# Altium PCB EB2019-LW27U19-P-MB03B(KL18).PcbDoc
Units mm, origin at the board's own origin, x right, y up, seen from the top; angles counter-clockwise.
Board outline 187.83 x 97.54 mm, 2 copper layers (Top Layer, Bottom Layer); 78 components, 53 nets, 221 pads, 28 vias.
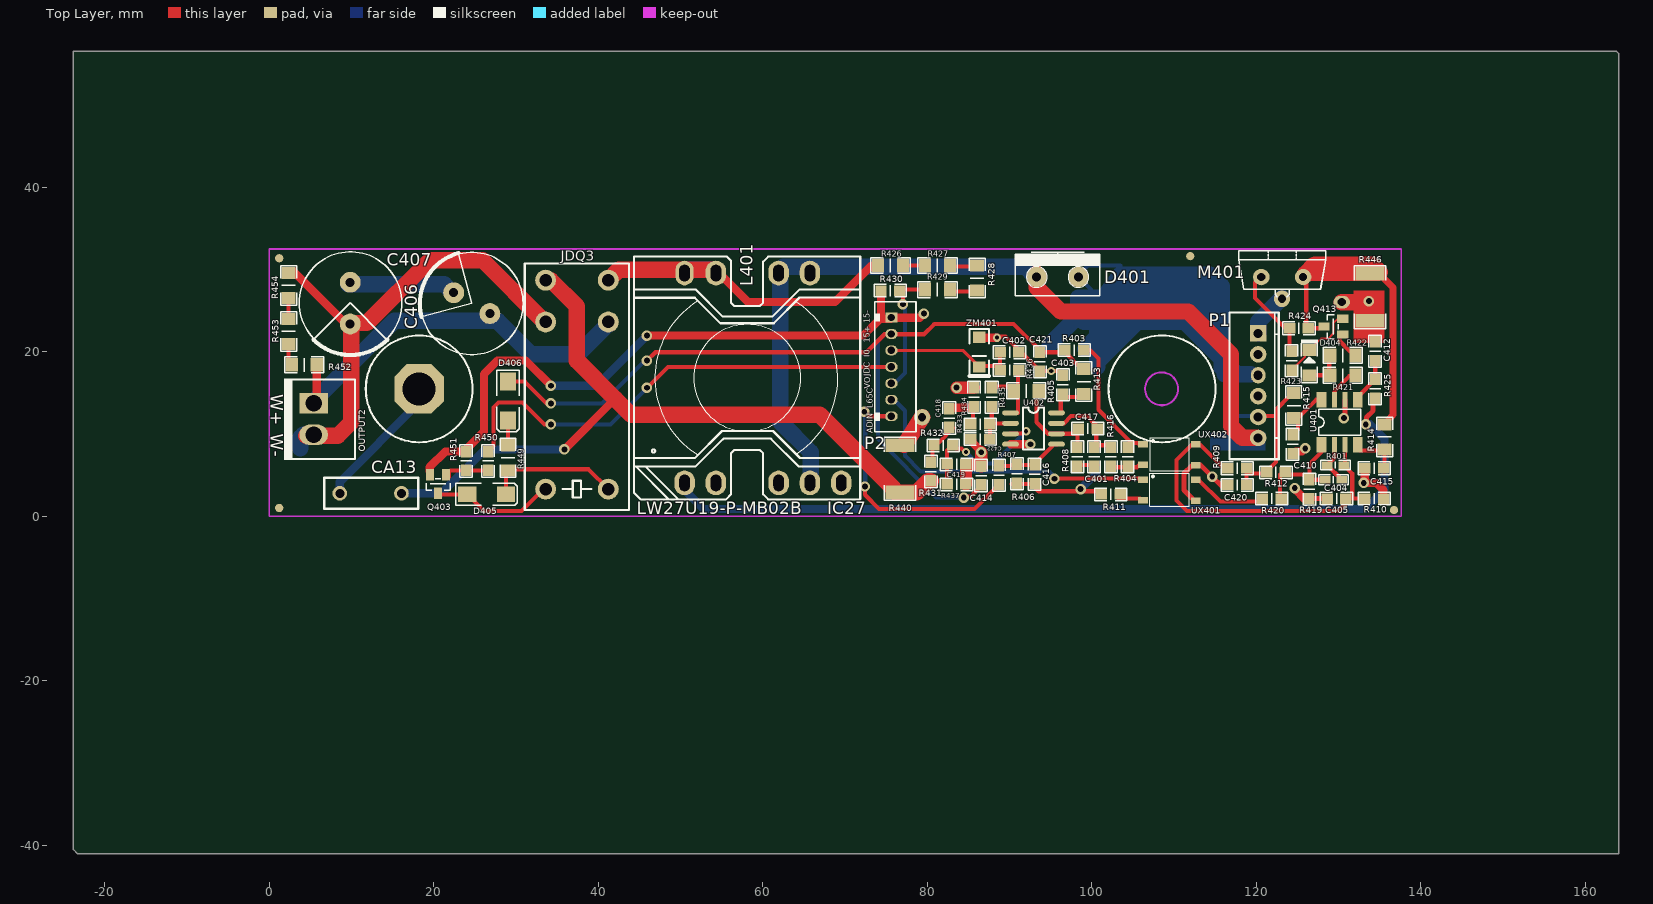
[diagram p0: Top Layer view]
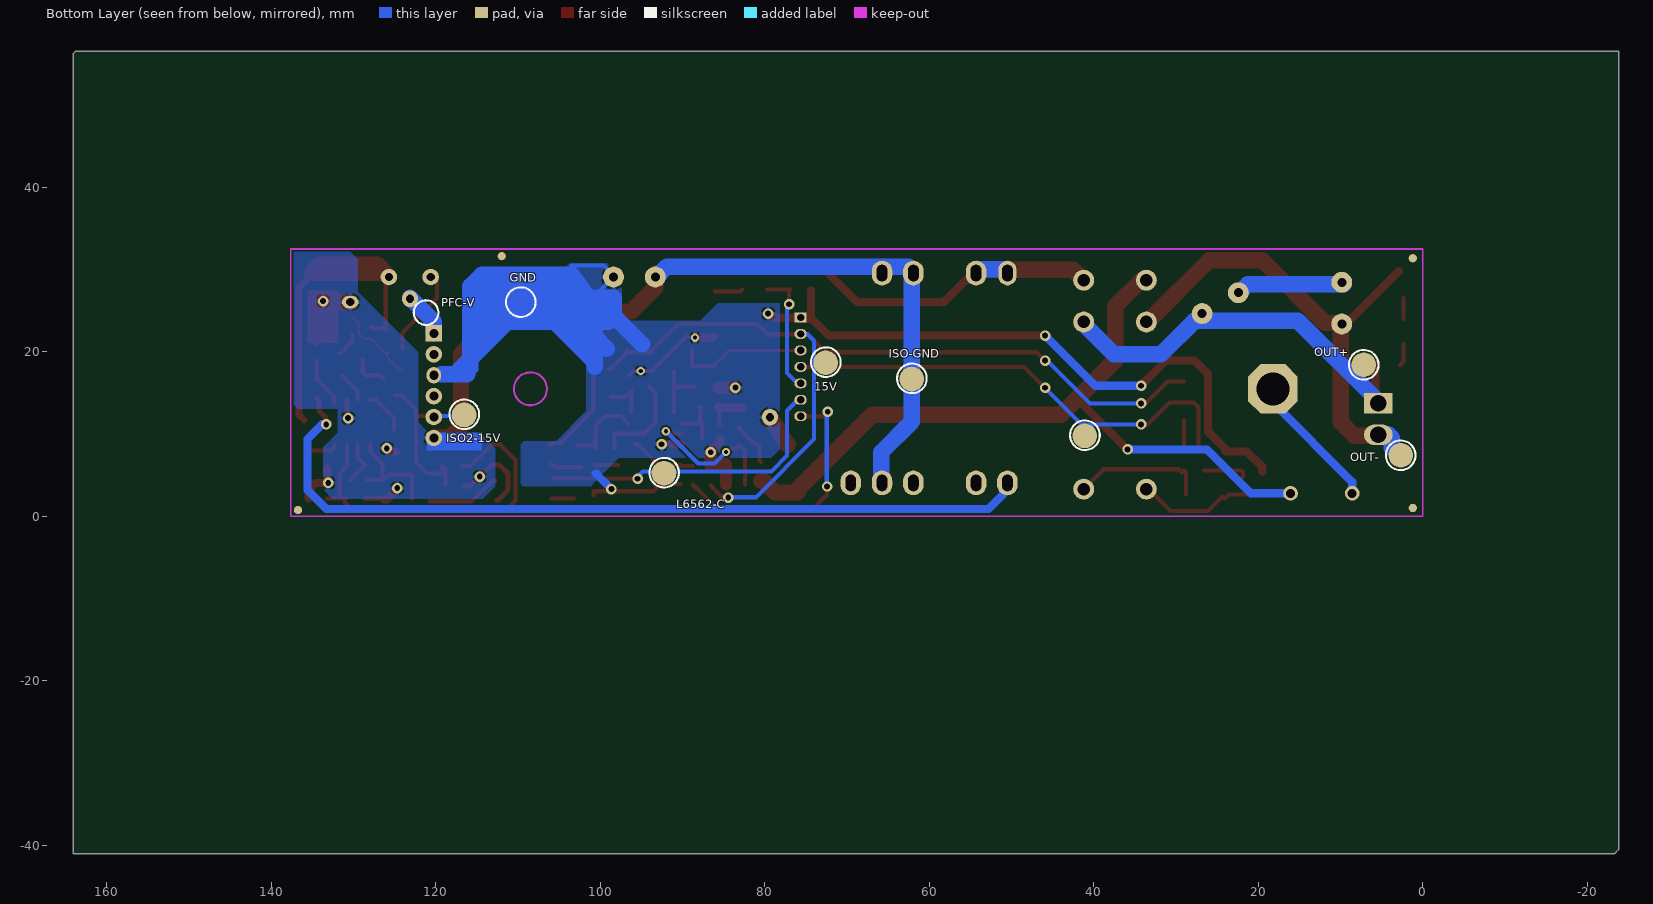
[diagram p1: Bottom Layer view, seen from below]

## Layer stack, top to bottom
Top Solder: solder mask 0.0102, Solder Resist, Dk 3.5
Top Layer: signal copper 0.0356
Dielectric1: dielectric 0.32, FR-4, Dk 4.8
Bottom Layer: signal copper 0.0356
Bottom Solder: solder mask 0.0102, Solder Resist, Dk 3.5

## Board outline
-23.79,56.515 163.789,56.515 164.043,56.261 164.043,-41.021 -23.282,-41.021 -23.79,-40.513 -23.79,56.007

## Design rules (kind name [scope] priority, off if disabled: settings)
Clearance [All] p1: gap=0.254 ignorepadtopadclearanceinfootprint=FALSE
ComponentClearance [All] p1: gap=0 collisioncheckmode=3 verticalgap=0 showdistances=FALSE
HoleToHoleClearance [All] p1: gap=0 allowstackedmicrovias=TRUE
MinimumSolderMaskSliver [All] p1: minsoldermaskwidth=0
PolygonConnect [All] p1: connectstyle=Relief reliefconductorwidth=0.5 reliefentries=4 polygonreliefangle="90 Angle" airgapwidth=0.254
RoutingVias [All] p1: holewidth=0.711 width=1.27 viastyle="Through Hole" minholewidth=0.711 minwidth=1.27 maxholewidth=0.711 maxwidth=1.27
SilkToSilkClearance [All] p1: silktosilkclearance=0
SilkToSolderMaskClearance SilkscreenOverComponentPads [IsPad] p1: minsilkscreentomaskgap=0 clearancetoexposedcopper=TRUE
SolderMaskExpansion [All] p1: expansion=0.102 istentingtop=FALSE
Width [All] p1: maxlimit=5 minlimit=0.254 preferedwidth=0.254 minimp=50.000000 maximp=50.000000 favimp=50.000000
25 further rules are at their usual default settings.

## Components (designator, comment, footprint, x,y, rotation, side; value= is the part's Value field where it differs from the comment)
C401 "" RW0805 100.289,7.239 r0 top
C402 "0805" RW0805 90.002,19.939 r270 top
C403 "301008" RW0805 96.479,16.002 r0 top
C404 "" RW0603 130.388,4.445 r90 top
C405 "301008" RW0805 129.753,2.159 r270 top
C406 "450V47uF" CE12.5 22.438,27.178 r330 top
C407 "450V47uF" CE12.5 9.865,23.368 r90 top
C410 "301009" RW0805 124.419,8.763 r180 top
C412 "301001" RW0805 134.452,20.066 r0 top
C414 "301008" RW0805 86.563,4.953 r0 top
C415 "" RW0805 134.325,5.842 r90 top
C416 "301008" RW0805 93.066,5.105 r180 top
C417 "301008" RW0805 99.527,10.668 r270 top
C418 "0805" RW0805 82.677,11.938 r0 top
C419 "301008" RW0805 83.566,6.325 r270 top (schematic designator C414)
C420 "301013" RW0805 117.688,3.81 r90 top
C421 "301013" RW0805 93.685,18.796 r180 top
C422 "301008" RW0805 86.462,9.373 r270 top (schematic designator C414)
CA13 "102" Y2C 16.225,2.822 r270 top
D401 "308006" TO-220-KA 95.844,29.083 r0 top
D404 "307004" SOD-123 126.451,18.669 r0 top
D405 "M7" SMA 28.661,2.667 r180 top
D406 "M7" SMA 29.042,11.811 r90 top
JDQ3 "HF115F" RELAY-HF115F 41.234,3.302 r90 top locked
L401 "PQ26/25" T-PQ2625 55.368,15.538 r180 top
M401 "314012" TO220VS 120.609,29.083 r0 top
OUTPUT2 "322055" JST-3.96-2P 5.42,13.716 r270 top
P1 "Header 6" 6P插座 120.228,22.225 r270 top
P2 "Header 7" 2.0*7 75.651,24.161 r270 top
Q403 "2N3904" SOT-23-BEC 20.533,3.937 r180 top
Q413 "309005" SOT-23-BEC 129.372,23.063 r90 top
R401 "" RW0603 128.61,6.223 r270 top
R403 "" RW0805 97.876,20.193 r270 top
R404 "" RW0805 104.353,7.239 r180 top
R405 "" RW1206 93.558,15.24 r90 top
R406 "" RW0805 90.907,5.156 r0 top
R407 "303020" RW0805 88.722,5.004 r180 top
R408 "303046" RW0805 98.257,7.239 r0 top
R409 "" RW0805 117.688,5.842 r270 top
R410 "" RW0805 134.325,2.159 r90 top
R411 "" RW0805 102.321,2.667 r270 top
R412 "303053" RW0805 122.387,5.334 r270 top
R413 "303074" RW1206 99.019,14.859 r0 top
R414 "" RW1206 135.595,8.128 r0 top
R415 "303074" RW1206 124.546,11.938 r0 top
R416 "0805" RW0805 102.321,7.239 r0 top
R419 "" RW0805 126.451,3.302 r0 top
R420 "" RW0805 121.879,2.159 r270 top
R421 "303075" RW1206 128.991,17.145 r270 top
R422 "" RW1206 128.991,19.558 r270 top
R423 "303073" RW0805 124.292,18.923 r0 top
R424 "303043" RW0805 125.181,22.86 r90 top
R425 "303055" RW0805 134.452,15.494 r180 top
R426 "303094" RW1206 74,30.48 r270 top
R427 "303094" RW1206 79.715,30.48 r270 top
R428 "303094" RW1206 86.065,30.48 r180 top
R429 "303094" RW1206 82.763,27.559 r90 top
R430 "303033" RW0805 75.524,27.432 r270 top
R431 "0805" RW0805 80.442,5.436 r0 top
R432 "0805" RW0805 81.966,8.611 r270 top
R433 "0805" RW0805 86.446,11.176 r90 top
R434 "0805" RW0805 85.684,14.478 r0 top
R435 "0805" RW0805 87.843,14.478 r0 top
R436 "0805" RW0805 90.002,17.78 r90 top
R437 "0805" RW0805 83.566,3.886 r90 top (schematic designator R433)
R440 "" RW2512 76.683,8.661 r180 top
R446 "" RW2512 133.817,29.515 r180 top
R449 "1206" RW1206 29.042,8.636 r180 top
R450 "0805" RW0805 26.629,6.731 r180 top
R451 "0805" RW0805 23.962,6.731 r180 top
R452 "303094" RW1206 2.753,18.415 r270 top
R453 "303094" RW1206 2.372,24.003 r180 top
R454 "303094" RW1206 2.372,29.591 r180 top
U401 "311046" SO-8 130.134,11.43 r0 top
U402 "311026" SOP-8 90.129,12.573 r270 top
UX401 "317001" LTV 109.433,3.175 r270 top
UX402 "317001" LTV 109.433,7.493 r270 top
ZM401 "5.1V" 二极管 86.319,21.761 r270 top

## Footprints (in the part's own frame and the unit in brackets; to place one, negate y for a bottom-side part, rotate by r counter-clockwise, add the part's x,y. Pads: shape width x height; smd on the part's side, far side on the other; paste and mask are expansions set on the pad)
2.0*7 [mm]
  rect 1.2x1.5 hole 0.9: 1(0,0)
  oval 1.2x1.5 hole 0.9: 2(2,0) 3(4,0) 4(6,0) 5(8,0) 6(10,0) 7(12,0)
  silkscreen extent -1.9,-2.01 13.89,2.99
6P插座 [mm]
  rect 2x2 hole 1.1: 1(0,0)
  round 2 hole 1.1: 2(2.54,0) 4(7.62,0) 5(10.16,0) 6(12.7,0)
  oval 2x1.8 hole 1.1: 3(5.08,0)
  silkscreen extent -2.54,-3.5 15.29,2.5
CE12.5 [mil]
  round 100 hole 43: +(200,0) -(0,0)
  silkscreen extent -148,-246 346,244
JST-3.96-2P [mm]
  rect 2.5x3.5 hole 2: 1(0,0)
  oval 2.5x3.5 hole 2: 2(3.81,0)
  silkscreen extent -3.05,-3.59 6.86,5.02
LTV [mm]
  rect 0.8x1.2 smd: 1(-1.27,-3.2) 2(1.23,-3.2) 3(1.27,3.2) 4(-1.27,3.2)
  silkscreen extent -2.04,-2.4 1.96,2.4
RELAY-HF115F [mil]
  round 100 hole 60: 1(0,300) 2(0,0) 3(800,300) 4(800,0) 5(1000,300) 6(1000,0)
  silkscreen extent -100,-100 1080,400
RW0603 [mil]
  rect 35x50 smd: 1(0,0) 2(0,80)
  silkscreen extent -23,-30 23,110
RW0805 [mil]
  rect 50x55 smd: 1(0,-45) 2(0,45)
  silkscreen extent -30,-77 30,77
RW1206 [mil]
  rect 66x58 smd: 1(0,0) 2(0,120)
  silkscreen extent -38,-34 38,154
RW2512 [mil]
  rect 140x65 smd: 1(0,0) 2(0,227)
  silkscreen extent -76,-38 76,265
SMA [mil]
  rect 87x75 smd: A(180,0) K(-6,0)
  silkscreen extent -60,-53 234,53
SO-8 [mm]
  rect 1.2x1.905 smd: 1(-2.2,-2.731) 4(2.2,-2.731) 5(2.2,2.73) 8(-2.2,2.73)
  rect 0.61x1.905 smd: 2(-0.63,-2.73) 3(0.64,-2.731) 6(0.64,2.73) 7(-0.63,2.73)
  silkscreen extent -2.53,-1.56 2.55,1.59
SOD-123 [mil]
  rect 66x58 smd: A(0,-61) K(0,61)
  silkscreen extent -41,-95 41,110
SOP-8 [mil]
  oval 24x80 smd: 1(0,0) 2(50,0) 3(100,0) 4(150,0) 5(150,220) 6(100,220) 7(50,220) 8(0,220)
  silkscreen extent -25,60 175,160
SOT-23-BEC [mil]
  rect 40x55 smd: B(-38,-45) C(0,45) E(38,-45)
  silkscreen extent -58,-24 57,30
T-PQ2625 [mm]
  rect 0x0 all layers, no hole: 1(8.673,11.474)
  oval 2.5x3 hole 1.25 slot 2 at 90 deg: 2(4.863,11.474) 3(1.053,11.474) 4(-6.567,11.474) 5(-10.377,11.474) 6(-14.187,11.474)
  round 0 all layers, no hole: 7(-14.187,-14.027) 12(8.673,-14.026)
  oval 2.5x3 hole 1.3 slot 2 at 90 deg: 8(-10.377,-14.027) 9(-6.567,-14.027) 10(1.053,-14.027)
  oval 2.2x3 hole 1.3 slot 2 at 90 deg: 11(4.863,-14.027)
  silkscreen extent -16.49,-16.03 11.01,13.47
TO220VS [mm]
  round 2 hole 1: 1(0,0) 2(2.517,-2.646) 3(5.08,0)
  silkscreen extent -2.75,-2.42 7.83,3.17
TO-220-KA [mil]
  round 100 hole 43: A(100,0) K(-100,0)
  silkscreen extent -202,-90 202,118
Y2C [mil]
  round 70 hole 43.31: 1(1.09,-5.11) 2(1.09,-300.38)
  silkscreen extent -74,-375 76,75
二极管 [mm]
  rect 1.35x1.5 smd: 1(0,0) 2(3.6,0)
  silkscreen extent -1.02,-1.2 4.7,1.2

## Part data
C401 C403 C404 C405 C414 C416 C417 C419 C422: library part CAP, "贴片?"
C402 C418: library part C
C406 C407: library part "Cap Pol2", "Polarized Capacitor"
C410 C412 C415 C420 C421: library part C, "贴片?"
CA13: library part CAP, "Cap"
D401: library part "Diode 1N914", "直插二"
D404: library part DIO
JDQ3: library part "Relay - 两组常开", "Dual-Pole Single-"
L401: library part indu
M401: library part MOSFET-N, "TO2"
OUTPUT2: library part "Header 2", "接线?"
P1: "Header, 6-Pi"
P2: "Header,"
Q403: library part NPN, "NPN Bipolar Tra"
Q413: library part PNP
R401 R403 R404 R405 R406 R407 R408 R409 R410 R411 R412 R413 R414 R415 R419 R420 R421 R422 R423 R424 R425 R426 R427 R428 R429 R430 R440 R446 R452 R453 R454: library part Res2, "贴片?"
R416 R431 R432 R433 R434 R435 R436 R437 R449 R450 R451: library part Res2, "Resistor"
U401: library part L6562, "贴片"
U402: library part LM393
UX401 UX402: library part Optoisolator1

## Free pads (board coordinates)
  round 1 all layers, no hole: 0(1.229,1.016) 0(1.229,31.369) 0(111.973,31.623) 0(136.738,0.762)
  round 3 on Bottom Solder: 0(2.703,7.416) 0(7.198,18.415) 0(41.107,9.779) 0(62.139,16.687) 0(72.603,18.669) 0(92.253,5.232) 0(109.737,26.062) 0(116.545,12.319) 0(121.194,24.688)
  round 3 smd far side: 0(2.703,7.416) 0(7.198,18.415) 0(41.107,9.779) 0(62.139,16.687) 0(72.603,18.669) 0(92.253,5.232) 0(116.545,12.319)
  oct 6x6 hole 4: 0(18.247,15.494)
  round 2 hole 1: 2(79.375,12.04)
  oval 2x1.524 hole 1: 3(130.388,26.035)

## Via types
v1: diameter 1.27, hole 0.711, Top Layer to Bottom Layer, 24 vias
v2: diameter 1, hole 0.5, Top Layer to Bottom Layer, 4 vias

## Nets (pads, with @x,y where several pads share a name; then routed paths per layer and width w, separated by ;. In a path a pad name is that pad's centre, name@x,y a point inside that pad or via, vN(x,y) a via of type N, cw(c..) or ccw(c..) an arc to the next point about the centre after c; other vN are vias at no path point)
15V: C414.1 C421.1 D406.A P2.2 pad.0@72.603,18.669 R403.1 R413.2 | length 107.5
  Top Layer w0.5: D406.A 31.074,16.383 33.741,13.716 v1(34.249,13.716) ; v1(45.933,18.923) 46.949,19.939 72.603,19.939 74.793,22.129 79.619,22.129 80.858,23.368 90.51,23.368 93.685,20.193 C421.1 ; v1(84.448,2.268) 84.595,2.415 85.285,2.415 85.911,3.042 85.911,3.095 86.563,3.746 C414.1 ; C421.1@94.066,19.939 R403.1@96.733,19.939 ; R403.1 R403.1@96.733,19.939 ; R413.2 98.765,17.907 R403.1@96.733,19.939
  Bottom Layer w0.5: v1(34.249,13.716) 40.472,13.716 45.679,18.923 v1(45.933,18.923) ; P2.2@75.651,22.129 74.793,22.129 74,21.336 74,9.398 81.087,2.311 84.405,2.311 v1(84.448,2.268)
ADIN2: P2.7 R407.2 | length 32
  Top Layer w0.508: v1(72.349,12.7) 72.888,12.161 P2.7 ; v1(72.418,3.625) 72.418,2.618 74.147,0.889 85.75,0.889 88.278,3.416 88.341,3.416 88.722,3.797 R407.2
  Bottom Layer w0.508: v1(72.349,12.7) 72.476,12.573 72.476,3.683 v1(72.418,3.625)
EARTH: CA13.2 pad.0@18.247,15.494 | length 15.6
  Bottom Layer w1: CA13.2 8.595,4.191 pad.0@18.12,13.716
  Bottom Layer w2: pad.0@17.358,13.716 pad.0@18.12,13.716
GND: C402.2 C403.2 C414.2 C416.2 C419.2 C421.2 C422.1 D401.A P1.3 P2.1 pad.2 Q403.E R406.1 R411.1 R430.1 R434.2 R437.1 R440.1 R451.1 U402.4 ZM401.1 | length 257.8
  Top Layer w0.5: ZM401.1@86.192,21.844 89.494,21.844 C421.2 v2(95.082,17.653) 95.971,17.653 C403.2 ; 90.256,3.937 92.669,3.937 93.558,3.048 100.797,3.048 R411.1@100.797,2.54 ; U402.4@90.383,8.763 U402.4@91.018,8.763
  Top Layer w1: Q403.E@19.517,5.486 19.517,5.969 21.422,7.874 R451.1 23.962,8.128 26.121,10.287 26.121,17.272 27.772,18.923 31.201,18.923 v1(34.249,15.875) ; v1(45.933,21.971) 72.222,21.971 74.254,24.003 ; R430.1 74.381,24.13 74.254,24.003 ; P2.1@75.524,24.003 74.254,24.003 ; P2.1@75.651,24.129 79.079,24.129 v1(79.588,24.638) ; C422.1 85.382,9.373 85.517,9.238 85.517,8.946 86.512,7.951 86.512,7.846 v1(86.563,7.794) ; ZM401.1@86.192,21.844 86.319,21.717 v2(88.478,21.717) ; U402.4 v1(92.542,8.763)
  Top Layer w1.5: v1(83.566,15.646) 83.591,15.621 R434.2 ; R437.1 C419.2 86.335,6.325 C414.2 v1(86.563,7.794)
  Top Layer w2: R440.1@77.175,8.687 77.226,8.687 pad.2
  Bottom Layer w0.5: D401.A@98.384,29.464 98.511,29.464 99.527,30.48 103.464,30.48 ; D401.A@98.892,28.575 99.908,27.559 ; 115.021,19.304 115.021,17.78 116.164,16.637
  Bottom Layer w1: v1(34.249,15.875) 39.837,15.875 v1(45.933,21.971) ; v1(98.638,3.302) 100.543,5.207 100.416,5.207 ; 101.432,18.796 105.559,22.924
  Bottom Layer w2: 94.9,20.9 97.953,23.953 ; 98.561,25.35 100.289,23.622 ; 98.892,25.527 109.941,25.527 ; 99.196,20.37 100.67,21.844 ; 100.67,18.161 100.67,21.844 ; 100.924,20.193 104.353,23.622 ; 102.249,23.423 100.67,21.844 ; 102.956,27.432 108.544,27.432 ; 104.48,23.749 104.353,23.622 ; 109.814,25.654 109.941,25.527 ; 110.322,27.559 113.37,27.559 114.132,26.797 114.132,24.13 ; 111.393,24.075 109.941,25.527 ; 112.608,25.4 112.608,27.051 ; 115.783,21.336 115.783,27.94 114.386,29.337 107.528,29.337 ; 116.164,17.272 117.688,17.272 ; 116.164,17.78 116.164,18.796 ; P1.3@119.339,17.272 117.688,17.272 ; 100.289,23.622 104.353,23.622 ; 100.289,23.622 100.67,23.241 100.67,21.844 ; 100.289,23.622 99.019,23.622 98.384,24.257 98.384,26.543 101.368,26.543 103.464,29.337 107.528,29.337 ; 104.353,23.622 111.338,23.622 115.783,19.177 ; 107.528,29.337 115.783,21.082 115.783,19.177 ; 115.783,19.177 116.164,18.796 ; 116.164,18.796 117.688,17.272
I_OUT2: C402.1 P2.3 R436.2 ZM401.2 | length 16.2
  Top Layer w0.4: P2.3 84.319,20.161 86.192,18.288 ZM401.2
  Top Layer w0.5: ZM401.2@86.192,18.288 88.859,18.288 C402.1 C402.1@88.859,20.32
ISO2-15V: C420.1 P1.5 pad.0@116.545,12.319 R409.2 R412.1 R415.2 | length 21.3
  Top Layer w0.5: C420.1 R409.2 ; R409.2@119.212,6.096 119.212,5.207 120.99,5.207 122.387,6.604 122.387,12.192 ; P1.5@120.228,12.192 122.387,12.192 ; R415.2@124.927,14.732 124.165,14.732 122.387,12.954 122.387,12.192
  Bottom Layer w0.5: pad.0@116.545,12.319 116.672,12.192 P1.5@119.339,12.192
ISO2-GND: C405.1 C410.2 C412.2 C415.2 C420.2 D401.K L401.5 L401.8 L401.9 P1.6 pad.0@62.139,16.687 pad.3 R410.1 R419.1 R446.2 U401.6 UX401.3 UX402.3 | length 128.5
  Top Layer w0.6: UX401.3 112.481,1.905 111.211,3.175 111.211,5.207 112.227,6.223 UX402.3 113.243,6.223 v1(114.64,4.826) 115.783,3.683 C420.2@116.545,3.683 ; R419.1@126.197,2.159 R419.1 C405.1 ; v1(130.642,11.938) 130.774,12.07 U401.6
  Top Layer w1: v1(124.673,3.429) 124.673,3.302 125.943,2.032 R419.1@126.324,2.032 ; C410.2@124.8,7.874 125.562,7.874 v1(125.943,8.255) ; C415.2 133.182,4.191 v1(133.055,4.064) 134.579,4.064 135.468,3.175 R410.1 ; R446.2@133.563,23.749 134.452,22.86 C412.2
  Top Layer w2: D401.K@93.304,29.464 D401.K 93.304,27.813 96.225,24.892 111.719,24.892 116.926,19.685 116.926,10.922 118.323,9.525 P1.6@120.101,9.525 ; pad.3 132.42,26.035
  Bottom Layer w2: L401.5@65.835,5.29 65.835,7.784 62.152,11.467 62.152,30.029 62.476,30.353 91.907,30.353 D401.K@92.986,29.273
  other v1: 133.69,26.162
JDQ2-C: P2.4 pad.0@41.107,9.779 R450.1 | length 58.2
  Top Layer w0.5: R450.1 27.264,8.509 27.264,13.208 27.899,13.843 30.82,13.843 33.487,11.176 v1(34.249,11.176) ; v1(45.933,15.621) 48.473,18.161 P2.4
  Bottom Layer w0.5: v1(34.249,11.176) 41.488,11.176 v1(45.933,15.621)
L6562-2C: P2.6 pad.0@92.253,5.232 UX401.1 | length 36.8
  Top Layer w0.5: v1@95.59,4.318 95.844,4.572 UX401.1@105.725,4.572
  Bottom Layer w0.5: P2.6@75.809,14.32 77.302,12.827 77.302,7.366 79.207,5.461 94.828,5.461 v1@95.272,5.016
  other v1: 95.463,4.572
NetC401_1: C401.1 R408.1 | length 2.8
  Top Layer w0.5: R408.1@97.876,6.223 C401.1@100.67,6.223
NetC401_2: C401.2 C417.2 R416.2 U402.7 | length 9.7
  Top Layer w0.5: U402.7@96.606,11.303 97.495,12.192 99.4,12.192 100.543,11.049 C401.2@100.543,8.636 ; C401.2@100.543,8.255 C401.2@100.543,8.636 ; R416.2@102.702,8.636 C401.2@100.543,8.636
NetC403_1: C403.1 R413.1 U402.8 | length 5.4
  Top Layer w0.5: U402.8@96.225,12.7 96.225,15.24 96.987,14.478 R413.1@98.765,14.478
NetC404_1: C404.1 R401.1 U401.2 | length 5.4
  Top Layer w0.5: U401.2 129.504,7.117 R401.1 C404.1
NetC404_2: C404.2 R412.2 R419.2 R420.2 U401.1 | length 13.6
  Top Layer w0.5: R420.2@122.895,2.159 122.895,5.08 125.689,5.08 R419.2@126.197,4.572 ; U401.1 127.934,7.833 126.451,6.35 126.451,4.572 R419.2@126.197,4.572 ; C404.2 R419.2 126.324,4.445 R419.2@126.197,4.572
NetC405_2: C405.2 R401.2 R409.1 R410.2 U401.3 UX402.4 | length 44.2
  Top Layer w0.5: R409.1@116.799,6.096 115.783,6.096 113.116,8.763 UX402.4 112.227,8.763 110.322,6.858 110.322,1.905 111.596,0.631 130.003,0.631 C405.2@131.086,1.714 ; U401.3 130.774,6.355 R401.2 131.658,5.207 131.658,2.286 ; C405.2 R410.2
NetC406_+: C406.+ JDQ3.4 OUTPUT2.1 pad.0@7.198,18.415 R452.2 | length 48.1
  Top Layer w1: OUTPUT2.1 5.801,14.097 R452.2
  Bottom Layer w2: OUTPUT2.1@5.483,14.034 15.199,23.749 27.772,23.749 31.836,19.685 37.551,19.685 41.234,23.368 JDQ3.4
NetC406_-: C406.- C407.+ | length 13.1
  Bottom Layer w2: C407.+@9.611,28.194 21.295,28.194 C406.-@22.311,27.178
NetC407_-: C407.- JDQ3.3 OUTPUT2.2 pad.0@2.703,7.416 R454.1 | length 60.8
  Top Layer w1: R454.1@2.943,29.781 9.23,23.495 9.865,23.495 C407.-
  Top Layer w2: OUTPUT2.2@4.531,9.779 8.341,9.779 9.992,11.43 C407.-@9.992,23.368 ; C407.-@9.865,23.495 11.897,23.495 19.533,31.131 25.978,31.131 33.487,23.622 JDQ3.3
  Bottom Layer w2: pad.0@3.762,8.255 3.762,9.518 4.15,9.906 OUTPUT2.2
NetC410_1: C410.1 R415.1 U401.8 | length 5.2
  Top Layer w0.5: 125.054,10.541 125.054,11.938 127.276,14.16 U401.8
NetC412_1: C412.1 R425.1 U401.5 | length 5.9
  Top Layer w0.5: U401.5@132.334,13.802 U401.5@132.334,14.034 ; U401.5 132.334,14.519 R425.1 C412.1
NetC415_1: C415.1 R414.1 U401.4 | length 6.3
  Top Layer w0.5: U401.4 132.334,8.341 132.674,8.001 135.595,8.001 C415.1@135.595,5.461
NetC416_1: C416.1 R406.2 R407.1 U402.5 | length 8.1
  Top Layer w0.5: R407.1@88.722,6.096 90.129,6.096 90.256,6.223 92.669,6.223 92.923,6.223 95.463,8.763 U402.5
NetC417_1: C417.1 R405.1 R408.2 U402.6 | length 11.9
  Top Layer w0.5: R405.1@94.066,15.748 R405.1 93.304,14.986 93.304,11.43 94.701,10.033 98.257,10.033 R408.2 R408.2@98.257,8.255
NetC418_1: C418.1 R431.2 R432.1 | length 5.5
  Top Layer w0.5: R431.2 80.632,6.769 80.632,8.42 R432.1 81.208,8.996 81.408,8.996 83.144,10.731 C418.1@83.144,10.795
NetC418_2: C418.2 R433.2 R434.1 | length 5.7
  Top Layer w0.5: R433.2 85.557,11.176 85.557,13.208 R434.1@85.557,13.589
  Top Layer w1: C418.2@82.677,13.208 85.557,13.208 R434.1
NetD404_A: D404.A R421.1 R422.1 | length 4.4
  Top Layer w0.5: D404.A@126.324,16.739 126.73,17.145 128.483,17.145 128.864,17.526 R422.1@128.864,19.05
NetD404_K: D404.K Q413.E R423.1 | length 9.7
  Top Layer w0.254: R423.1@124.038,17.78 R423.1 125.943,19.431 D404.K@125.943,19.685 ; D404.K@125.714,19.837 126.095,19.837 127.848,21.59 128.737,21.59 129.372,22.225 129.372,23.495 129.905,24.028 Q413.E@130.134,24.028
NetD405_A: D405.A JDQ3.1 Q403.C | length 15.1
  Top Layer w0.5: Q403.C@20.457,2.667 23.581,2.667 D405.A@24.089,2.159 ; D405.A@24.343,2.413 26.121,0.635 30.693,0.635 JDQ3.1@33.614,3.556
NetD405_K: D405.K JDQ3.2 R449.2 | length 16.1
  Top Layer w0.5: D405.K 28.813,5.359 R449.2 ; R449.2@29.296,5.334 29.677,5.715 38.821,5.715 JDQ3.2
NetD406_K: D406.K R449.1 | length 3
  Top Layer w0.5: R449.1 D406.K
NetL401_2: L401.2 R425.2 | length 101
  Top Layer w0.6: v1@133.055,11.176 133.372,11.493 133.372,12.002 134.198,12.827 134.198,14.097 R425.2
  Bottom Layer w1: L401.2@50.722,4.274 50.722,2.958 52.799,0.881 83.871,0.881 83.873,0.879 85.023,0.879 85.025,0.881 133.301,0.881 135.595,3.175 135.595,9.398 133.817,11.176 v1(133.309,11.176)
NetM401_1: M401.1 R423.2 R424.2 | length 11.3
  Top Layer w0.5: M401.1@120.609,29.591 120.609,29.21 119.847,28.448 119.847,26.543 124.038,22.352 R423.2@124.038,20.32
NetM401_3: M401.3 Q413.C R414.2 R424.1 R446.1 | length 46.7
  Top Layer w0.5: M401.3@125.498,29.781 126.07,29.21 R424.1@126.07,23.063 ; R424.1@125.943,22.733 126.07,22.86 R424.1 127.645,22.86 Q413.C@127.848,23.063
  Top Layer w0.8: R446.1@134.325,29.083 135.341,29.083 136.611,27.813 136.611,12.319 R414.2@135.976,11.684
  Top Layer w2: M401.3@125.943,29.464 127.086,30.607 134.071,30.607 R446.1@135.023,29.654 ; M401.3@126.324,29.591 R446.1@134.833,29.591
NetQ403_B: Q403.B R450.2 R451.2 | length 5.5
  Top Layer w0.5: Q403.B@21.866,4.763 21.866,5.397 22.057,5.588 R450.2
NetQ413_B: Q413.B R422.2 | length 2.9
  Top Layer w0.5: Q413.B@130.134,22.098 130.134,21.336 R422.2@131.658,19.812
NetR403_2: R403.2 R404.1 UX402.1 | length 15.7
  Top Layer w0.5: R403.2 99.781,20.193 100.797,19.177 100.797,12.954 104.607,9.144 104.607,8.89 105.598,8.89 105.725,8.763 UX402.1
NetR404_2: R404.2 R416.1 UX402.2 | length 3.7
  Top Layer w0.5: R416.1@102.321,5.969 105.511,5.969 UX402.2@105.892,6.35
NetR405_2: R405.2 R435.2 R436.1 U402.1 | length 7.6
  Top Layer w0.5: 88.478,15.748 R405.2@91.018,15.748 ; U402.1@91.018,12.573 R405.2@91.018,15.748 ; R436.1@91.018,17.653 R405.2@91.018,15.748
NetR411_2: R411.2 UX401.2 | length 2.7
  Top Layer w0.5: R411.2@103.21,2.159 UX401.2@105.892,2.159
NetR420_1: R420.1 UX401.4 | length 9.1
  Top Layer w0.5: UX401.4@112.735,4.318 113.116,4.318 115.656,1.778 R420.1@120.736,1.778
NetR421_2: R421.2 U401.7 | length 3.7
  Top Layer w0.5: U401.7 129.504,15.245 131.277,17.018 R421.2@131.404,17.018
NetR426_2: R426.2 R427.1 | length 2.7
  Top Layer w0.5: R426.2 R427.1
NetR427_2: R427.2 R428.1 | length 3.4
  Top Layer w0.5: R427.2 82.89,30.353 R428.1@86.065,30.353
NetR428_2: R428.2 R429.1 | length 3.4
  Top Layer w0.5: R429.1 83.017,27.305 R428.2@86.065,27.305
NetR432_2: C419.1 R432.2 R437.2 U402.3 | length 18.5
  Top Layer w0.5: R437.2 C419.1 82.423,7.988 83.045,8.611 R432.2 83.494,8.226 84.177,8.226 84.574,7.829 v2(84.709,7.829) ; U402.3 90.15,10.054 91.532,10.054 91.816,10.338 v2(92.024,10.338)
  Bottom Layer w0.5: v2(84.709,7.829) 86.137,6.401 88.087,6.401 v2(92.024,10.338)
NetR433_1: C422.2 R433.1 R435.1 U402.2 | length 6.5
  Top Layer w0.5: R433.1@87.534,10.982 87.608,10.907 C422.2@87.608,9.376 ; R435.1@87.847,13.331 87.847,11.434 R433.1 87.716,11.303 U402.2
NetR434_2: 
NetR452_1: R452.1 R453.2 | length 2.7
  Top Layer w0.508: R453.2 2.372,18.796 R452.1
NetR453_1: R453.1 R454.2 | length 2.5
  Top Layer w0.508: R453.1 R454.2
PFC_V: M401.2 P1.1 | length 5.5
  Bottom Layer w2: P1.1 120.228,23.666 M401.2@123.126,26.564
V_OUT2: P2.5 R429.2 R430.2 | length 15.2
  Top Layer w0.5: v1@77.048,25.654 v1(77.048,25.781) 77.048,27.432 76.921,27.559 R429.2
  Bottom Layer w0.5: P2.5@75.651,16.129 76.032,16.129 77.302,17.399 v1@77.302,25.654
WLED+: JDQ3.6 L401.10 L401.11 R426.1 | length 40.6
  Top Layer w1: L401.10@54.315,29.947 58.227,26.035 68.793,26.035 73.238,30.48 R426.1
  Top Layer w2: JDQ3.6 42.479,29.947 L401.10@54.315,29.947
  Bottom Layer w2: L401.11@50.468,30.029 L401.10@54.278,30.029
WLED-: CA13.1 JDQ3.5 R431.1 R440.2 | length 92.9
  Top Layer w1: v1(35.9,8.128) 42.059,14.287
  Top Layer w2: JDQ3.5 34.249,28.702 37.424,25.527 37.424,18.923 42.059,14.287 44.028,12.319 66.954,12.319 75.905,3.369 75.905,3.07 76.079,2.896 78.715,2.896 80.112,4.293 R431.1
  Bottom Layer w1: CA13.1 20.914,2.794 26.248,8.128 v1(35.9,8.128)
pads on no net: L401.1 L401.3 L401.4 L401.6 L401.7 L401.12 P1.2 P1.4

## Polygon pours and split planes (outlines as drawn)
GND on Bottom Layer "Top Layer-No Net" (solid, remove dead copper, pour order 4): 78.191,25.908 78.191,8.128 79.207,7.112 97.749,7.112 100.67,4.191 101.178,3.683 109.433,3.683 109.687,3.937 109.687,5.969 109.687,8.763 109.56,8.89 109.306,9.144 106.131,9.144 105.369,9.144 101.686,12.827 101.686,17.907 101.686,20.828 99.654,22.86 98.765,23.749 92.796,23.749 87.843,23.749 85.811,25.781 85.684,25.908 78.191,25.908
ISO2-GND on Bottom Layer "ISO2-GND" (solid, remove dead copper, pour order 8): 114.386,9.906 112.735,8.255 112.735,5.08 112.735,3.683 114.259,2.159 132.547,2.159 133.69,3.302 133.69,8.382 132.166,9.906 131.912,10.16 131.912,13.081 134.198,13.081 136.738,13.081 137.5,13.843 137.5,32.004 136.992,32.512 130.769,32.512 129.499,31.242 129.499,27.305 124.927,22.733 122.133,19.939 122.133,14.859 122.133,11.43 120.736,10.033 120.482,9.779 118.45,9.779
GND on Bottom Layer "GND" (solid, remove dead copper, pour order 12): 97.368,26.543 97.368,28.956 99.146,30.734 103.718,30.734 104.353,30.099 104.353,28.575 102.321,26.543

## Keep-outs
Keep-Out Layer:
  circle w0.254: c108.489,15.494 r2
  lines w0.2: 0,0 137.6,0 137.6,32.5 0,32.5 0,0
  text "LW27U19-P-MB02B(IC27)" at 32.334,-18.212 h4

## Other copper
Top Layer:
  rectangle net ISO2-GND: 131.785,21.082 135.595,27.432
Bottom Layer:
  rectangle net ISO2-GND: 114.386,8.001 121.117,10.16

## Silkscreen, mask and mechanical layers (free items; w line width, h text height)
Top Overlay:
  circle w0.254: c108.544,15.494 r6.5
  circle w0.254: c18.247,15.494 r6.5
  text "15-" at 72.984,23.495 h0.7 r90
  text "15+" at 72.984,21.082 h0.7 r90
  text "I0" at 72.984,19.304 h0.7 r90
  text "JDC" at 72.984,17.018 h0.7 r90
  text "VO" at 73.05,15.494 h0.7 r90
  text "W+" at 0.213,14.859 h1.5 r270
  text "L65C" at 73.381,13.132 h0.7 r90
  text "ADIN" at 73.39,10.109 h0.7 r90
  text "W-" at 0.213,10.033 h1.5 r270
  text "LW27U19-P-MB02B" at 44.663,0.254 h1.5
  text "IC27" at 67.869,0.254 h1.5
Bottom Overlay:
  circle w0.254: c92.228,5.307 r1.8
  circle w0.254: c2.703,7.416 r1.8
  circle w0.254: c7.198,18.415 r1.8
  circle w0.254: c62.114,16.762 r1.8
  circle w0.254: c116.52,12.394 r1.8
  circle w0.254: c41.082,9.854 r1.8
  circle w0.254: c72.578,18.744 r1.8
  circle w0.254: c121.169,24.763 r1.5
  circle w0.254: c109.662,26.037 r1.8
  text "GND" at 110.998,28.524 h1
  text "PFC-V" at 119.329,25.502 h1
  text "OUT+" at 13.208,19.431 h1
  text "ISO-GND" at 64.922,19.253 h1
  text "15V" at 74,15.24 h1
  text "ISO2-15V" at 118.694,9.017 h1
  text "OUT-" at 8.814,6.68 h1
  text "L6562-C" at 90.78,0.991 h1

## Dimensions
137.6,0 to 0,0 on Keep-Out Layer
0,0 to 0,32.5 on Keep-Out Layer